# Altium PCB CANdruino.PcbDoc
Units mm, origin at the board's own origin, x right, y up, seen from the top; angles counter-clockwise.
Board outline 74 x 18.5 mm, 2 copper layers (Top Layer, Bottom Layer); 42 components, 48 nets, 198 pads, 33 vias.
Unrouted connection lines stored in the file: 131.
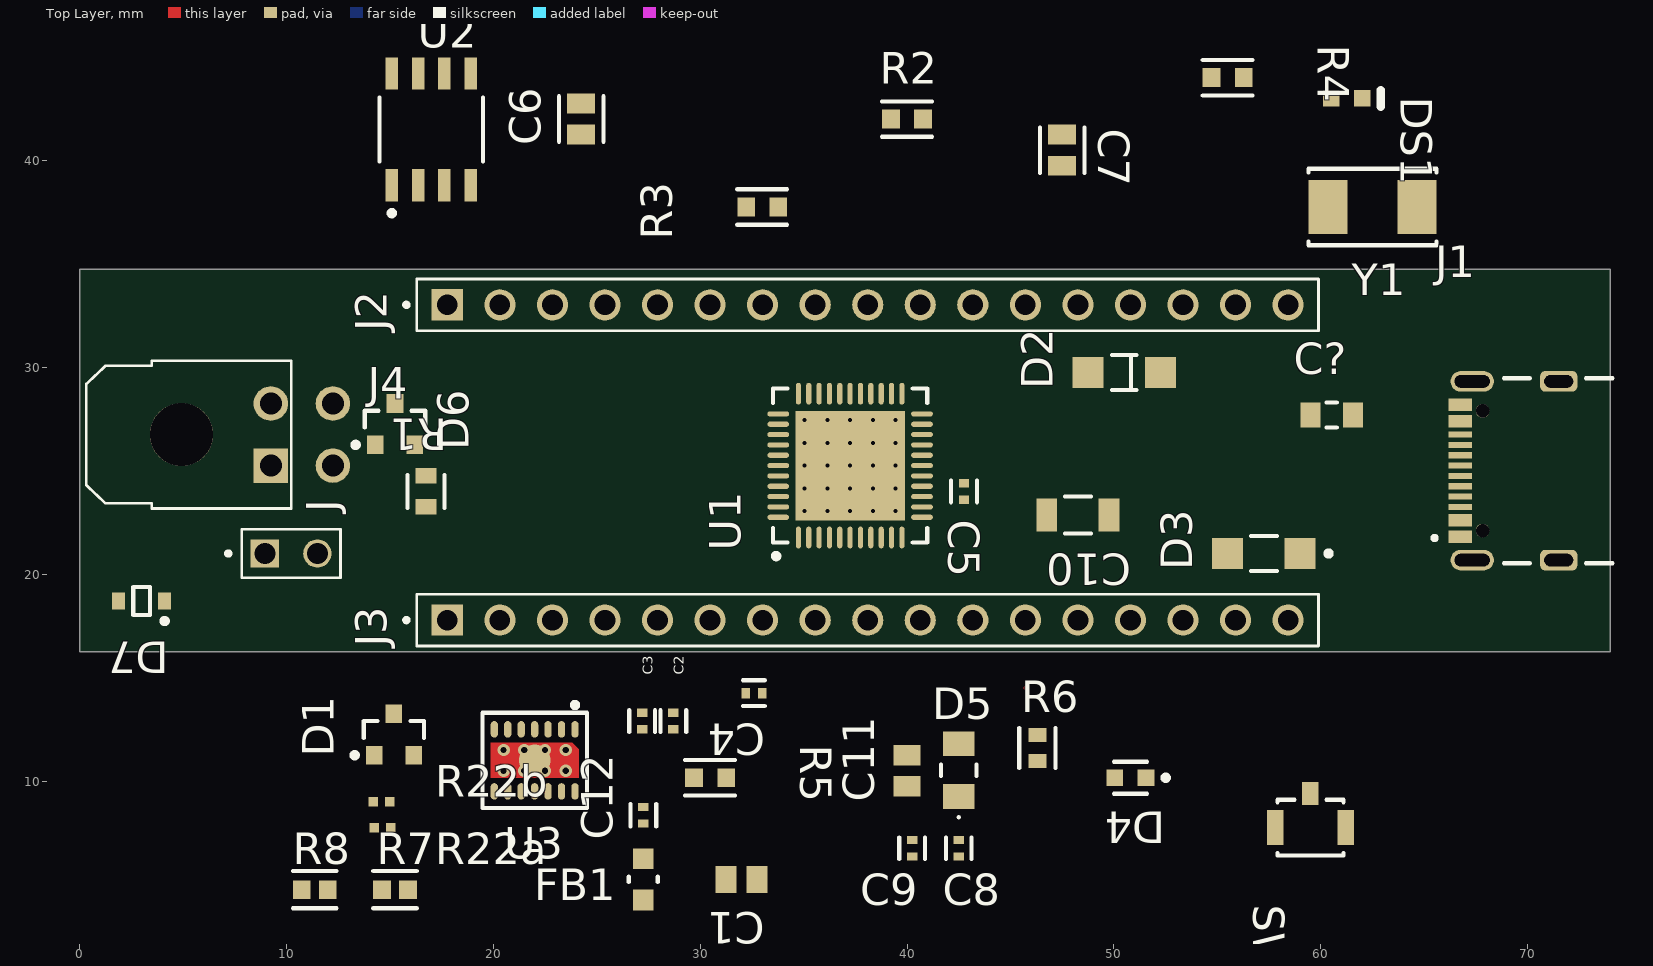
[diagram p0: Top Layer view]
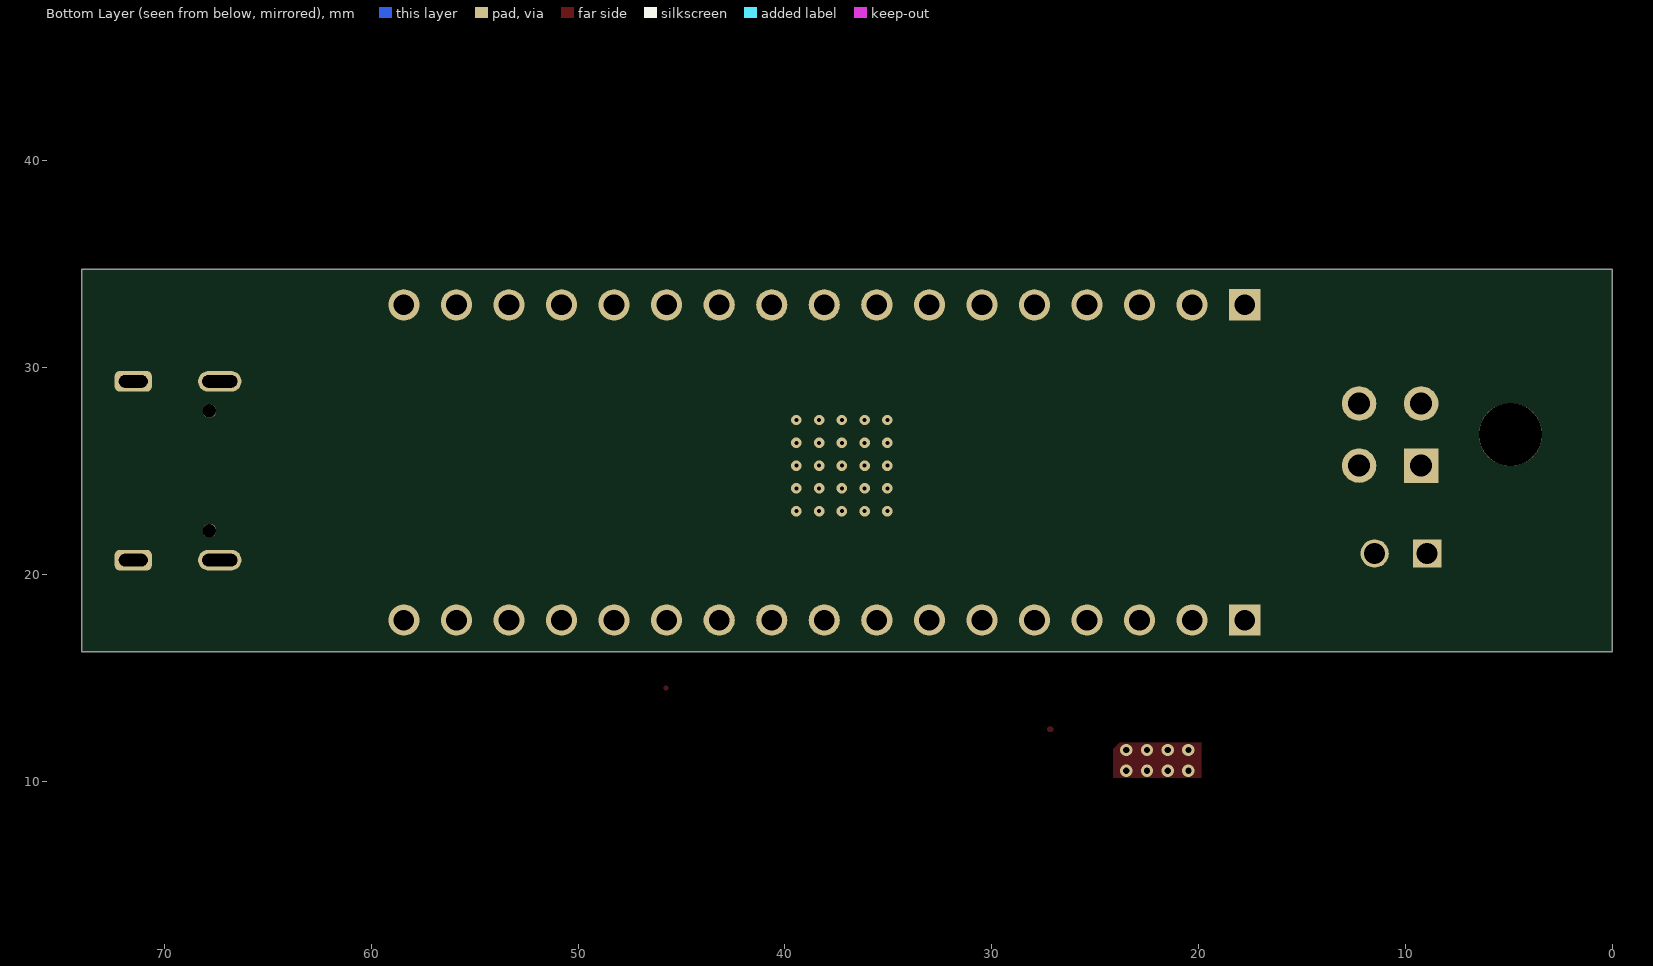
[diagram p1: Bottom Layer view, seen from below]

## Layer stack, top to bottom
Top Solder: solder mask 0.0102, Solder Resist, Dk 3.5
Top Layer: signal copper 0.0356
Dielectric 1: dielectric 0.32, FR-4, Dk 4.8
Bottom Layer: signal copper 0.0356
Bottom Solder: solder mask 0.0102, Solder Resist, Dk 3.5

## Board outline
0,16.25 0,34.75 74,34.75 74,16.25

## Design rules (kind name [scope] priority, off if disabled: settings)
BoardOutlineClearance [All] p1: gap=0.2 ignorepadtopadclearanceinfootprint=FALSE
Clearance [All] p1: gap=0.09 ignorepadtopadclearanceinfootprint=FALSE except(0.1: Arc-SMDPad Track-SMDPad; 0.15: SMDPad-SMDPad; 0.2: Arc-Via Track-Via Via-Fill Via-Poly Via-Region; 0.3: THPad-Fill THPad-Poly THPad-Region; 0.35: Arc-THPad Track-THPad)
ComponentClearance [All] p1: gap=0.01 collisioncheckmode=3 verticalgap=0.01 showdistances=FALSE
MinimumAnnularRing [All] p1: minimumring=0.2
MinimumSolderMaskSliver [All] p1: minsoldermaskwidth=0.1
PolygonConnect [All] p1: connectstyle=Relief reliefconductorwidth=0.254 reliefentries=4 polygonreliefangle="90 Angle" airgapwidth=0.254
RoutingVias [All] p1: holewidth=0.711 width=1.27 viastyle="Through Hole" minholewidth=0.711 minwidth=1.11 maxholewidth=0.711 maxwidth=1.27
SolderMaskExpansion [All] p1: expansion=0.038 istentingtop=FALSE
SupplyNets "Schematic Supply Nets_2" [InNet('GND')] p1: voltage=0.000
SupplyNets "Schematic Supply Nets" [InNet('+5')] p2: voltage=0.000
Width [All] p1: maxlimit=0.254 minlimit=0.16 preferedwidth=0.254 minimp=50.000000 maximp=50.000000 favimp=50.000000
28 further rules are at their usual default settings.

## Components (designator, comment, footprint, x,y, rotation, side; value= is the part's Value field where it differs from the comment)
C1 "1uF" CAPC2013X135X45LL10T25 32,5.25 r180 top
C2 "100nF" FP-GRM15-MFG 28.7,12.9 r90 top value=0.10μF
C3 "100nF" FP-GRM15-MFG 27.2,12.9 r90 top value=0.10μF
C4 "100nF" FP-GRM15-MFG 32.6,14.25 r180 top value=0.10μF
C5 "100nF" FP-GRM15-MFG 42.75,24 r90 top value=0.10μF
C6 "18 pF" FP-C0805C-DN-MFG 24.25,42 r90 top
C7 "18 pF" FP-C0805C-DN-MFG 47.5,40.5 r90 top
C8 "100nF" FP-GRM15-MFG 42.5,6.75 r270 top value=0.10μF
C9 "100nF" FP-GRM15-MFG 40.25,6.75 r270 top value=0.10μF
C10 "100nF" FP-1206-L_3_2_0_2-W_1_6_0-MFG 48.26,22.86 r180 top
C11 "1uF" CAPC2013X135X45LL10T25 40,10.5 r90 top
C12 "1uF" FP-GRM15-0_1-MFG 27.25,8.35 r90 top
C? "CGA3E2X7R1H104K080AA" FP-CGA3E-0_3-0_1-IPC_A 60.525,27.7 r0 top
D1 "SM05T1G" ONSC-SOT-23-3-318-08_V 15.2,12.25 r90 top
D2 "HSMG-C150" FP-HSMG-C150-MFG 50.5,29.75 r180 top
D3 "HSMS-C150" FP-HSMS-C150-MFG 57.25,21 r180 top
D4 "HSMR-C191" FP-HSMR-C191-MFG 50.8,10.16 r180 top
D5 "CD1206-S01575" BOUR-CD1206-S01575-2_L 42.5,10.525 r270 top
D6 "SM05T1G" ONSC-SOT-23-3-318-08_V 15.25,27.25 r90 top
D7 "SZMM3Z5V1T1G" ONSC-SOD-323-2-477-02_V 3,18.7 r180 top
DS1 "HSMY-C190" AVAG-HSMX-C190_V 61.25,43 r0 top
FB1 "MH2029-300Y" FP-MH2029-MFG 27.25,5.25 r90 top value=30Ω
J "3-644456-2" TE_3-644456-2 8.96,21 r0 top
J1 "USB4105GFA060" GCT_USB4105GFA060 71.5,25 r90 top
J2 "M20-7821746" HARWIN_M20-7821746 38.1,33.02 r180 top
J3 "M20-7821746" HARWIN_M20-7821746 38.1,17.78 r180 top
J4 "43045-0400" MOLEX_43045-0400 6.45,26.75 r270 top
R1 "120" FP-CRCW0603-e3-MFG 16.75,24 r90 top
R2 "AC0603FR-071KL" FP-AC0603-IPC_B 40,42 r0 top
R3 "AC0603FR-071KL" FP-AC0603-IPC_B 33,37.75 r180 top
R4 "AC0603FR-071KL" FP-AC0603-IPC_B 55.5,44 r0 top
R5 "AC0603FR-071KL" FP-AC0603-IPC_B 30.48,10.16 r0 top
R6 "10k" FP-MCT0603-IPC_C 46.3,11.6 r270 top
R7 "56k Ohm" FP-RR0816-IPC_C 15.25,4.75 r180 top
R8 "56K" FP-RR0816-IPC_C 11.374,4.75 r0 top
R22a "22" RESC1005X40X25LL05T05 14.65,7.75 r180 top
R22b "22" RESC1005X40X25LL05T05 14.6,9 r180 top
SW1 "B3U-1100PM" FP-B3U-1100PM-MFG 59.5,7.75 r180 top
U1 "ATmega32U4-MU" 44PW_M 37.25,25.25 r90 top
U2 "MCP2561FDT-E/SN" FP-C04-057-SN-MFG 17,41.5 r90 top
U3 "MCP2518FDT-E/QBB" FP-C04-21361-MFG 22,11 r270 top
Y1 "ABM7-16.000MHZ-D2Y-T" FP-ABM7-MFG 62.5,37.75 r0 top

## Footprints (in the part's own frame and the unit in brackets; to place one, negate y for a bottom-side part, rotate by r counter-clockwise, add the part's x,y. Pads: shape width x height; smd on the part's side, far side on the other; paste and mask are expansions set on the pad)
44PW_M [mm] "QFN, 44-Leads, Body 7x7mm, Pitch 0.5mm, Thermal Pad 5.3x5.3mm, IPC Low Density"
  oval 1.05x0.25 smd: 1(-3.475,2.5) 2(-3.475,2) 3(-3.475,1.5) 4(-3.475,1) 5(-3.475,0.5) 6(-3.475,0) 7(-3.475,-0.5) 8(-3.475,-1) 9(-3.475,-1.5) 10(-3.475,-2) 11(-3.475,-2.5) 23(3.475,-2.5) 24(3.475,-2) 25(3.475,-1.5) 26(3.475,-1) 27(3.475,-0.5) 28(3.475,0) 29(3.475,0.5) 30(3.475,1) 31(3.475,1.5) 32(3.475,2) 33(3.475,2.5)
  oval 0.25x1.05 smd: 12(-2.5,-3.475) 13(-2,-3.475) 14(-1.5,-3.475) 15(-1,-3.475) 16(-0.5,-3.475) 17(0,-3.475) 18(0.5,-3.475) 19(1,-3.475) 20(1.5,-3.475) 21(2,-3.475) 22(2.5,-3.475) 34(2.5,3.475) 35(2,3.475) 36(1.5,3.475) 37(1,3.475) 38(0.5,3.475) 39(0,3.475) 40(-0.5,3.475) 41(-1,3.475) 42(-1.5,3.475) 43(-2,3.475) 44(-2.5,3.475)
  rect 5.3x5.3 smd: 45(0,0)
  silkscreen extent -4.5,-3.73 3.73,3.72, body extent -3.57,-3.57 3.57,3.57, height 0.9
AVAG-HSMX-C190_V [mm] "SMD, 2-Leads, Body 1.6x0.8mm, Height 0.9mm"
  rect 0.8x0.8 smd: 1(-0.75,0) 2(0.75,0)
  silkscreen extent 1.65,-0.4 1.65,0.4, body extent -0.8,-0.4 0.8,0.4, height 0.9
BOUR-CD1206-S01575-2_L [mm] "Molded Diode, 2-Leads, Body 3.4x1.7mm, IPC High Density"
  rect 1.2x1.5 smd: 1(-1.275,0) 2(1.275,0)
  silkscreen extent -0.28,-0.85 2.32,0.85, body extent -1.7,-0.85 1.7,0.85, height 0.95
CAPC2013X135X45LL10T25 [mm] "Chip Capacitor, 2-Leads, Body 2.00x1.25mm, IPC High Density"
  rect 1x1.3 smd: 1(-0.75,0) 2(0.75,0)
  body extent -1.05,-0.67 1.05,0.68, height 1.35
FP-1206-L_3_2_0_2-W_1_6_0-MFG [mm]
  rect 1x1.6 smd paste+0 mask+0: 1(-1.5,0) 2(1.5,0)
  silkscreen extent -0.63,-0.9 0.63,0.9, body extent -2.1,-1 2.1,1, height 0.25
FP-ABM7-MFG [mm]
  rect 1.9x2.6 smd paste+0 mask+0: 1(-2.15,0) 2(2.15,0)
  silkscreen extent -3.1,-1.85 3.1,1.85, body extent -3.2,-1.95 3.2,1.95, height 0.25
FP-AC0603-IPC_B [mm]
  rect 0.859x0.912 smd paste+0 mask+0: 1(-0.777,0) 2(0.777,0)
  silkscreen extent -1.21,-0.86 1.21,0.86, body extent -1.46,-0.71 1.46,0.71, height 0.25
FP-B3U-1100PM-MFG [mm]
  rect 0.8x1.7 smd paste+0 mask+0: 1(1.7,0) 2(-1.7,0)
  rect 0.8x1.1 smd paste+0 mask+0: 3(0,-1.65)
  silkscreen extent -1.6,-1.35 1.6,1.35, body extent -2.2,-2.3 2.2,1.45, height 0.25
FP-C04-057-SN-MFG [mm]
  rect 1.55x0.6 smd paste+0 mask+0: 1(-2.7,1.905) 2(-2.7,0.635) 3(-2.7,-0.635) 4(-2.7,-1.905) 5(2.7,-1.905) 6(2.7,-0.635) 7(2.7,0.635) 8(2.7,1.905)
  silkscreen extent -4.17,-2.5 1.55,2.5, body extent -3.57,-2.75 3.57,2.75, height 0.25
FP-C04-21361-MFG [mm]
  rrect100% 0.8x0.35 smd paste+0 mask+0: 1(-1.5,1.95) 2(-1.5,1.3) 3(-1.5,0.65) 4(-1.5,0) 5(-1.5,-0.65) 6(-1.5,-1.3) 7(-1.5,-1.95) 8(1.5,-1.95) 9(1.5,-1.3) 10(1.5,-0.65) 11(1.5,0) 12(1.5,0.65) 13(1.5,1.3) 14(1.5,1.95)
  round 1.53 smd paste+0 mask+0: 15(0,0)
  Top Layer region: 0.85,2.125 -0.55,2.125 -0.85,1.825 -0.85,-2.125 0.85,-2.125 0.85,2.125
  silkscreen extent -2.8,-2.52 2.3,2.52, body extent -2,-2.4 2,2.4, height 0.25
FP-C0805C-DN-MFG [mm]
  rect 0.95x1.35 smd paste+0 mask+0: 1(-0.75,0) 2(0.75,0)
  silkscreen extent -1.1,-1.07 1.1,1.07, body extent -1.4,-0.85 1.4,0.85, height 0.25
FP-CGA3E-0_3-0_1-IPC_A [mm]
  rect 0.956x1.206 smd paste+0 mask+0: 1(-1.025,0) 2(1.025,0)
  silkscreen extent -0.25,-0.6 0.25,0.6, body extent -2,-1.1 2,1.1, height 0.25
FP-CRCW0603-e3-MFG [mm]
  rect 0.75x1 smd paste+0 mask+0: 1(-0.75,0) 2(0.75,0)
  silkscreen extent -0.8,-0.9 0.8,0.9, body extent -1.22,-0.6 1.22,0.6, height 0.25
FP-GRM15-0_1-MFG [mm]
  rect 0.4x0.5 smd paste+0 mask+0: 1(-0.4,0) 2(0.4,0)
  silkscreen extent -0.55,-0.63 0.55,0.63, body extent -0.7,-0.38 0.7,0.38, height 0.25
FP-GRM15-MFG [mm]
  rect 0.4x0.5 smd paste+0 mask+0: 1(-0.4,0) 2(0.4,0)
  silkscreen extent -0.53,-0.63 0.53,0.63, body extent -0.7,-0.38 0.7,0.38, height 0.25
FP-HSMG-C150-MFG [mm]
  rect 1.5x1.5 smd paste+0 mask+0: 1(-1.75,0) 2(1.75,0)
  silkscreen extent -0.6,-0.85 0.6,0.85, body extent -2.6,-0.95 2.6,0.95, height 0.25
FP-HSMR-C191-MFG [mm]
  rect 0.8x0.8 smd paste+0 mask+0: 1(-0.75,0) 2(0.75,0)
  silkscreen extent -1.83,-0.77 0.8,0.77, body extent -1.25,-0.55 1.25,0.55, height 0.25
FP-HSMS-C150-MFG [mm]
  rect 1.5x1.5 smd paste+0 mask+0: 1(-1.75,0) 2(1.75,0)
  silkscreen extent -3.25,-0.85 0.63,0.85, body extent -2.6,-0.95 2.6,0.95, height 0.25
FP-MCT0603-IPC_C [mm]
  rect 0.664x0.862 smd paste+0 mask+0: 1(-0.629,0) 2(0.629,0)
  silkscreen extent -0.96,-0.87 0.96,0.87, body extent -1.06,-0.58 1.06,0.58, height 0.25
FP-MH2029-MFG [mm]
  rect 1x1 smd paste+0 mask+0: 1(-1,0) 2(1,0)
  silkscreen extent -0.13,-0.7 0.13,0.7, body extent -1.6,-0.8 1.6,0.8, height 0.25
FP-RR0816-IPC_C [mm]
  rect 0.855x0.906 smd paste+0 mask+0: 1(-0.626,0) 2(0.626,0)
  silkscreen extent -1.05,-0.9 1.05,0.9, body extent -1.15,-0.6 1.15,0.6, height 0.25
GCT_USB4105GFA060 [mm]
  rect 0.6x1.15 smd: A1_B12(-3.2,4.755) A4_B9(-2.4,4.755) B1_A12(3.2,4.755) B4_A9(2.4,4.755)
  rect 0.3x1.15 smd: A5(-1.25,4.755) A6(-0.25,4.755) A7(0.25,4.755) A8(1.25,4.755) B5(1.75,4.755) B6(0.75,4.755) B7(-0.75,4.755) B8(-1.75,4.755)
  oval 1x2.1 hole 0.6 slot 1.7 at 90 deg: SH1(-4.32,4.18) SH2(4.32,4.18)
  rrect50% 1x1.8 hole 0.6 slot 1.4 at 90 deg: SH3(-4.32,0) SH4(4.32,0)
  round 0.65 hole 0.65 unplated: ""(-2.89,3.68) ""(2.89,3.68)
  silkscreen extent -4.47,-2.6 4.47,6.1
HARWIN_M20-7821746 [mm]
  rect 1.508x1.508 / inner round 1.508 / far side rect 1.508x1.508 hole 1: 1(20.32,0)
  round 1.508 hole 1: 2(17.78,0) 3(15.24,0) 4(12.7,0) 5(10.16,0) 6(7.62,0) 7(5.08,0) 8(2.54,0) 9(0,0) 10(-2.54,0) 11(-5.08,0) 12(-7.62,0) 13(-10.16,0) 14(-12.7,0) 15(-15.24,0) 16(-17.78,0) 17(-20.32,0)
  silkscreen extent -21.79,-1.25 22.4,1.25
MOLEX_43045-0400 [mm]
  rect 1.67x1.67 hole 1.07: 1(1.5,2.8)
  round 1.67 hole 1.07: 2(-1.5,2.8) 3(1.5,5.8) 4(-1.5,5.8)
  round 3.05 hole 3.05 unplated: ""(0,-1.52)
  silkscreen extent -3.57,-6.12 3.57,3.79
ONSC-SOD-323-2-477-02_V [mm] "SOD, 2-Leads, Body 1.7x1.25mm"
  rect 0.63x0.83 smd: 1(-1.115,0) 2(1.115,0)
  silkscreen extent -1.24,-0.67 0.4,1.09, body extent -0.85,-0.63 0.85,0.63, height 1.06
ONSC-SOT-23-3-318-08_V [mm] "SOT23, 3-Leads, Body 2.92x1.3mm, Pitch 0.95mm"
  rect 0.9x0.8 smd: 1(-1,0.95) 2(-1,-0.95) 3(1,0)
  silkscreen extent -1.12,-1.46 0.65,2.02, body extent -0.65,-1.46 0.65,1.46, height 1.11
RESC1005X40X25LL05T05 [mm] "Chip Resistor, 2-Leads, Body 1.00x0.50mm, IPC High Density"
  rect 0.45x0.45 smd: 1(-0.4,0) 2(0.4,0)
  body extent -0.53,-0.27 0.53,0.28, height 0.4
TE_3-644456-2 [mm]
  rect 1.37x1.37 hole 1.02: 1(0,0)
  round 1.37 hole 1.02: 2(2.54,0)
  silkscreen extent -1.87,-1.17 3.66,1.17

## Part data
C1 C11: library part CMP-1036-04761-2, Manufacturer=Murata, Part Number=GRM21BR71H105KA12L
C2 C3 C4 C5 C8 C9: library part CMP-2100-03641-2, "CAP CER 0.1UF 16V X7R 0402", Capacitance=0.10μF, Manufacturer=Murata, Manufacturer Part Number=GRM155R71C104KA88D, Package=GRM15, Temperature="-55°C to +125°C", Temperature Characteristic=X7R, Temperature Range High=+125°C, Temperature Range Low=-55°C, Tolerance=10%, Voltage Rating=16Vdc, Category=Cap, ComponentLink2Description=Datasheet, ComponentLink2URL=https://search.murata.co.jp/Ceramy/image/img/A01X/G101/ENG/GRM155R71H471KA01-01A.pdf, Device Class L1="Passive Components", Device Class L2=Capacitors, Device Class L3="Ceramic Capacitors", Digikey Description="CAP CER 0.1UF 16V X7R 0402", Height=0.55mm, Ipc Land Pattern Name=CAPC10050X219, Lead Free=yes, Material=Ceramic, Mouser Description="0402 0.1 uF 16V ±10 % Tolerance X7R SMT Multilayer Ceramic Capacitor", Octopart=https://octopart.com/grm155r71c104ka88d-murata-196880, RoHS=TRUE, Standoff Height=0mm
C6 C7: library part CMP-2007-00302-2, "CAP CER 18PF 50V C0G/NP0 0805", Manufacturer=KEMET, Manufacturer Part Number=C0805C180J5GACTU, Package=C0805C-DN, Temperature="-55°C to +125°C", Temperature Characteristic=C0G, Temperature Coefficient=30ppm/°C, Temperature Range High=+125°C, Temperature Range Low=-55°C, Tolerance=0.05, Voltage Rating="50 V", Automotive=No, Capacitance="18 pF", Category=Cap, ComponentLink2Description=Datasheet, ComponentLink2URL=https://content.kemet.com/datasheets/KEM_C1003_C0G_SMD.pdf, Device Class L1="Passive Components", Device Class L2=Capacitors, Device Class L3="Ceramic Capacitors", Digikey Description="CAP CER 18PF 50V C0G/NP0 0805", Height=0.88mm, Ipc Land Pattern Name=CAPC200125X78, Lead Free=Yes, Material=Ceramic, Mouser Description="Cap Ceramic 18pF 50V C0G 5% SMD 0805 125C Paper T/R", Octopart=https://octopart.com/c0805c180j5gactu-kemet-144810, RoHS=TRUE
C10: library part CMP-04427-004798-1, "General Purpose Ceramic Capacitor, 1206, 100nF, 10%, X7R, 15%, 100V", Case Code (Imperial)=1206, Case Code (Metric)=3216, Dielectric=X7R, Max Operating Temperature=125°C, Min Operating Temperature=-55°C, Package Quantity=1, Tolerance=10%, Voltage Rating=100V, Capacitance=100nF, Case/Package=1206, Construction=Flat, Depth=1.6mm, Features="Soft Termination", Lead Free="Lead Free", Length=3.2mm, Mount="Surface Mount", Number of Pins=2, Packaging="Tape and Reel", Radiation Hardening=No, REACH SVHC="No SVHC", RoHS Compliant=Yes, Series=FLEXITERM®, Termination=SMD/SMT, Thickness=0.05inch, Voltage Rating (DC)=100V, Width=0.063inch
C12: library part CMP-2008-04556-2, "CAP CER 1UF 10V X5R 0402", Manufacturer=Murata, Manufacturer Part Number=GRM155R61A105KE15D, Package=GRM15-0.1, Temperature="-55°C to +85°C", Temperature Characteristic=X5R, Temperature Coefficient=15%, Temperature Range High=+85°C, Temperature Range Low=-55°C, Tolerance=10%, Voltage Rating=10V, Automotive=No, Capacitance=1uF, Category=Cap, ComponentLink2Description=Datasheet, ComponentLink2URL=https://search.murata.co.jp/Ceramy/image/img/A01X/G101/ENG/GRM155R61A105KE15-01A.pdf, Device Class L1="Passive Components", Device Class L2=Capacitors, Device Class L3="Ceramic Capacitors", Digikey Description="CAP CER 1UF 10V X5R 0402", Height=0.55mm, Ipc Land Pattern Name=CAPC10050X50, Lead Free=Yes, Material=Ceramic, Mouser Description="0402 1 uF 10 V ±10% Tolerance X5R Surface Mount Multilayer Ceramic Capacitor", Octopart=https://octopart.com/grm155r61a105ke15d-murata-197442, RoHS=TRUE
C?: library part CMP-2000-07546-2, "Cap Ceramic 100nF 50V X7R 10% Pad SMD 0603 +125°C Automotive T/R", Capacitance=100nF, Case Code (Imperial)=0603, Case Code (Metric)=1608, Dielectric=X7R, Max Operating Temperature=125°C, Min Operating Temperature=-55°C, Package Quantity=1, Ratings=AEC-Q200, Tolerance=10%, Voltage=50V, Case/Package=0603, Composition=Ceramic, Depth=0.8mm, Height=0.8mm, Lead Free="Lead Free", Length=1.6mm, Mount="Surface Mount", Packaging="Tape and Reel", Radiation Hardening=No, REACH SVHC="No SVHC", Termination=SMD/SMT, Thickness=0.035inch, Voltage Rating=50V, Voltage Rating (DC)=50V, Weight=7.1E-05oz, Width=0.8mm
D1 D6: library part CMP-1061-00666-1, "Transient Voltage Suppressor Diode Array, Dual Common Anode Diodes for ESD Protection, 3-Pin SOT-23, Pb-Free, Tape and Reel", Manufacturer="On Semiconductor", ComponentLink1Description="Manufacturer URL", ComponentLink1URL=http://www.onsemi.com/, ComponentLink2Description=Datasheet, ComponentLink2URL=http://www.onsemi.com/pub_link/Collateral/SM12T1-D.PDF, ComponentLink3Description="Package Specification", ComponentLink3URL=http://www.onsemi.cn/pub_link/Collateral/318-08.PDF, DatasheetVersion="Rev. 6", Direction=Unidirectional, IR Max (uA)=10, Mounting Technology="Surface Mount", PackageDescription="3-Pin Small Outline Transistor, Body 2.92 x 1.3 mm, Pitch 0.95 mm", PackageReference=SOT-23-3-318-08, PackageVersion="Rev. AP, 11/2009", Packing="Tape and Reel", PartNumber=SM05T1G, PPK Max (W)=300, RoHS=Pb-Free
D2: library part CMP-2000-05061-2, "LED GREEN DIFFUSED 1206 SMD", Colour=Green, Forward Current=20mA, Forward Voltage=2.2V, Manufacturer=Broadcom, Max Junction Temp=+95°C, Power Dissipation=65mW, Reverse Voltage=5V, Temperature="-40°C to +85°C", Temperature Range High=+85°C, Temperature Range Low=-40°C, Automotive=No, Category=Diode, ComponentLink2Description=Datasheet, ComponentLink2URL=https://docs.broadcom.com/docs/AV02-0551EN, Device Class L1=Optoelectronics, Device Class L2=LEDs, Device Class L3=unset, Digikey Description="LED GREEN DIFFUSED 1206 SMD", Height=1.2mm, Ipc Land Pattern Name=DIOCP320160X55, Lead Free=Yes, Led Orientation="Top View", Luminous Intensity=15mcd, Manufacturer Part Number=HSMG-C150, Mouser Description="LED Uni-Color Green 570nm 2-Pin Chip LED T/R", Octopart=https://octopart.com/hsmg-c150-broadcom-71131304, Package=HSMG-C150, Peak Emmision Wavelength=570nm, RoHS=TRUE, Viewing Angle=170°, Wavelength=572nm
D3: library part CMP-21615-000001-1, "LED RED DIFFUSED CHIP SMD", Case Code (Imperial)=1206, Case Code (Metric)=3216, Color=Red, Forward Current=20mA, Forward Voltage=2.1V, Lens Color=White, Max Operating Temperature=85°C, Min Operating Temperature=-40°C, Package Quantity=1, Power Dissipation=65mW, Reverse Voltage=5V, Case/Package=1206, Depth=1.6mm, Dominant Wavelength=626nm, Height=1.1mm, Illumination Color=Red, Lead Free="Lead Free", Length=3.2mm, Lens Style=Rectangular, Lens Transparency=Diffused, Luminous Intensity=10mcd, Mount="Surface Mount", Number of Elements=1, Number of LEDs=1, Number of Pins=2, Packaging="Tape and Reel", Power Rating=65mW, Radiation Hardening=No, REACH SVHC="No SVHC", Test Current=20mA, Viewing Angle=170°, Wavelength=626nm, Width=1.6mm
D4: library part CMP-02129-71131536-1, "HSMR-C191 High-Performance Chip LED Single Color LED, Blue, Untinted Diffused, 1mm", Case Code (Imperial)=0603, Case Code (Metric)=1608, Color=Blue, Forward Current=20mA, Forward Voltage=3.4V, Lens Color="Clear, White", Max Junction Temperature (Tj)=95°C, Max Operating Temperature=85°C, Max Power Dissipation=78mW, Min Operating Temperature=-40°C, Reverse Voltage=5V, Case/Package=0603, Contact Plating=Gold, Depth=800µm, Dominant Wavelength=473nm, Height=600µm, Illumination Color=Blue, Lead Free="Lead Free", Length=1.6mm, Lens Style=Diffused, Lens Transparency=Diffused, Luminous Flux=88lm, Luminous Intensity=55mcd, Mount="Surface Mount", NexarPartId=71131536, Number of Elements=1, Number of LEDs=1, Number of Pins=2, Packaging="Tape and Reel", Peak Wavelength=469nm, Power Dissipation=78mW, Power Rating=78mW, Radiation Hardening=No, REACH SVHC="No SVHC", RoHS=Compliant, Schedule B=8541402000, Test Current=20mA, Viewing Angle=140°, Wavelength=473nm, Width=800µm
D5: library part CMP-0583-00001-2, "75 V Small Signal Switching Diode, 150 mA, 2.5 uA, 1026 Molded Package, RoHS, Tape and Reel", Average Forward Current="150 mA", Capacitance Between Terminals (Max.)="3 pF", Forward Voltage (Max.)="1.00 V", Manufacturer=Bourns, Reverse Current (Max.)="2.5 uA", Reverse Voltage="75 V", ComponentLink1Description="Manufacturer URL", ComponentLink1URL=http://www.bourns.com/, ComponentLink2Description=Datasheet, ComponentLink2URL=http://www.bourns.com/data/global/pdfs/CD1206_S01575.pdf, ComponentLink3Description="Package Specification", ComponentLink3URL=http://www.bourns.com/data/global/pdfs/CD1206_S01575.pdf, DatasheetVersion="Rev. 06/11", Mounting Technology="Surface Mount", PackageDescription="2-Pin SMD, Body 3.2 x 1.5 mm", PackageReference=CD1206-S01575-2, Packing="Tape and Reel", PartNumber=CD1206-S01575, Reverse Recovery Time (Max.)="4 nS", RoHS=TRUE
D7: library part CMP-1060-00693-1, "Zener Voltage Regulator, 300 mW, 2-Pin SOD-323, Pb-Free, Tape and Reel", Manufacturer="On Semiconductor", ComponentLink1Description="Manufacturer URL", ComponentLink1URL=http://www.onsemi.com/, ComponentLink2Description=Datasheet, ComponentLink2URL=http://www.onsemi.cn/pub_link/Collateral/MM3Z2V4T1-D.PDF, ComponentLink3Description="Package Specification", ComponentLink3URL=http://www.onsemi.com/pub_link/Collateral/477-02.PDF.1, DatasheetVersion="Rev. 9", Mounting Technology="Surface Mount", P Max (W)=0.3, PackageDescription="2-Pin SOD, Body 1.7 x 1.25 mm", PackageReference=SOD-323-2-477-02, PackageVersion="Rev. H, 03/2007", Packing="Tape and Reel", PartNumber=SZMM3Z5V1T1G, RoHS=Pb-Free, VZ Typ (V)=5.1
DS1: library part CMP-1744-00003-1, "LED Uni-Color Yellow, 65 mW, 20 mA, -40 to 85 degC, 2-Pin SMD, RoHS, Tape and Reel", Case Code (Imperial)=0603, Case Code (Metric)=1608, Max Operating Temperature="155 degC", Min Operating Temperature="-55 degC", Package Quantity=5000, Power Rating="100 mW", Resistance="390 Ohm", Tolerance=1%, Voltage Rating="50 V", Case\Package=0603, ComponentLink1Description="Manufacturer URL", ComponentLink1URL=http://www.avagotech.com/, ComponentLink2Description=Datasheet, ComponentLink2URL=http://docs.avagotech.com/docs/AV02-0551EN, ComponentLink3Description="Package Specification", ComponentLink3URL=http://www.fairchildsemi.com/dwg/MA/MA03D.pdf, DatasheetVersion=Mar-12, Height="0.45 mm", Length="1.6 mm", Mount="Surface Mount", PackageDescription="2-Pin Surface Mount Device, Body 1.6 x 0.8 mm, Height 0.9 mm", PackageReference=HSMX-C190, Packaging="Tape and Reel", Pins=2, REACH SVHC="No SVHC", RoHSCompliant=true, Voltage Rating (DC)="50 V", Width="0.8 mm"
FB1: library part CMP-07252-000001-1, "FERRITE BEAD 30 OHM 0805 1LN", Impedance At Frequency="30Ω @ 100MHz", Manufacturer=Bourns, Package=MH2029, Resistance=30Ω, Rms Current=3A, Series Resistance=25mΩ, Temperature="-55°C to +125°C", Temperature Range High=+125°C, Temperature Range Low=-55°C, Tolerance=25%, Automotive=No, Category=FBead, ComponentLink2Description=Datasheet, ComponentLink2URL=https://www.bourns.com/docs/Product-Datasheets/mh.pdf, Core Material=Ferrite, Device Class L1="Passive Components", Device Class L2="EMI / RFI Components", Device Class L3="Ferrite Beads and Chips", Digikey Description="FERRITE BEAD 30 OHM 0805 1LN", Height=1.1mm, Ipc Land Pattern Name=CAPC200120X90, Lead Free=Yes, Manufacturer Part Number=MH2029-300Y, Mouser Description="Ferrite Beads 30 ohms 25% HIGH CURRENT", Octopart=https://octopart.com/mh2029-300y-bourns-756929, RoHS=TRUE
J: library part CMP-002-00074-1, "Connector Unshrouded Header HDR 2 Position 2.54mm Solder Straight Thru-Hole", Case/Package=None, Centerline_Pitch="2.54 mm[.1 in]", Component Type=Standard, Design Item ID=3-644456-2, Digi-Key_Part_Number=A31112-ND, Digi-Key_Purchase_URL=https://www.digikey.com/product-detail/en/te-connectivity-amp-connectors/3-644456-2/A31112-ND/698344?utm_source=snapeda&utm_medium=aggregator&utm_campaign=symbol, EU_RoHS_Compliance=Compliant, MF="TE Connectivity", MP=3-644456-2, Number_of_Positions=2, Pins=2, Product_Type=Connector, SnapEDA_Link=https://www.snapeda.com/parts/3-644456-2/TE%20Connectivity%20AMP%20Connectors/view-part/520887/?ref=snap, Source=SnapEDAsch.SchLib, TE_purchase_URL=https://www.te.com/usa-en/product-3-644456-2.html?te_bu=Cor&te_type=disp&te_campaign=seda_glo_cor-seda-global-disp-prtnr-fy19-seda-model-bom-cta_sma-317_1&elqCampaignId=32493
J1: library part CMP-003-000000-1, Package=None, Availability=Unavailable, Component Type=Standard, Design Item ID=USB4105GFA060, MF="{'manufacturer': u'GCT'}", MP=USB4105GFA060, Pin Count=16, Price=None, Source=USB4105GFA060.SchLib
J2 J3: library part CMP-002-00071-1, "2.54mm (0.1) Pitch SIL Vertical Throughboard Socket Assembly, tin, 17 contacts", Case/Package=None, Check_prices=https://www.snapeda.com/parts/M20-7821746/Harwin/view-part/?ref=eda, Component Type=Standard, Design Item ID=M20-7821746, MF=Harwin, MP=M20-7821746, Pins=17, SnapEDA_Link=https://www.snapeda.com/parts/M20-7821746/Harwin/view-part/?ref=snap, Source=M20-7821746.SchLib
J4: library part CMP-002-00073-1, "Conn Micro-Fit 2x2 Way Header 3mm Pitch r/Angle Ti", Case/Package=None, Availability=Unavailable, Component Type=Standard, Design Item ID=43045-0400, MP=43045-0400, Pins=4, Price=None, Source=43045-0400.SchLib
R1: library part CMP-1666-00020-3, "RES Thick Film, 120Ω, 1%, 0.1W, 100ppm/°C, 0603", Case Code (Imperial)=0603, Case Code (Metric)=1608, Max Operating Temperature=155°C, Max Power Dissipation=100mW, Min Operating Temperature=-55°C, Package Quantity=10, Resistance=120R, Resistance Tolerance=1%, Resistor Type="Thick Film", Temperature Coefficient=100ppm/°C, Voltage Rating=75V, Case/Package=0603, Construction=Rectangular, Contact Plating=Tin, Depth=0.85mm, Features="Automotive AEC-Q200", Height=0.45mm, Lead Free="Lead Free", Length=1.55mm, Military Standard=Not, Mount="Surface Mount", Number of Terminations=2, Packaging="Tape and Reel", Power Rating=100mW, Radiation Hardening=No, RoHS Compliant=Yes, Series=CRCW, Technology="THICK FILM", Termination=SMD/SMT, Tolerance=1%, Voltage Rating (DC)=75V, Weight=7.1E-05oz, Width=0.033inch, Working Voltage=75V
R2 R3 R4 R5: library part CMP-2000-04828-3, "RES 1kΩ 1.00% 0.1W 0603", Case Code (Imperial)=0603, Case Code (Metric)=1608, Max Operating Temperature=155°C, Max Power Dissipation=100mW, Min Operating Temperature=-55°C, Package Quantity=1, Ratings=AEC-Q200, Resistance=1kR, Resistor Type="Thick Film", Temperature Coefficient=100ppm/°C, Tolerance=1%, Voltage Rating=50V, Case/Package=0603, Construction=Rectangular, Depth=0.8mm, Features="Moisture Resistant", Height=0.022inch, Lead Free="Lead Free", Length=0.063inch, Military Standard=Not, Number of Terminations=2, Packaging="Tape and Reel", Power Rating=100mW, RoHS Compliant=Yes, Series=AC, Size Code=0603, Termination=SMD/SMT, Width=0.031inch
R6: library part CMP-02407-000418-1, "RES SMD 100 OHM 1% 1/8W 0603", Case Code (Imperial)=0603, Case Code (Metric)=1608, Max Operating Temperature=125°C, Max Power Dissipation=125mW, Min Operating Temperature=-55°C, Package Quantity=1, Power Rating=100mW, Resistance=10kR, Temperature Coefficient=50ppm/°C, Tolerance=1%, Voltage Rating=75V, Case/Package=0603, Composition="Thin Film", Contact Plating=Tin, Depth=0.85mm, Height=0.022inch, Lead Free="Lead Free", Length=1.55mm, Military Standard=Not, Mount="Surface Mount", Number of Terminations=2, Packaging="Tape and Reel", Radiation Hardening=No, Voltage Rating (DC)=75V, Width=0.8mm
R7 R8: library part CMP-2000-02705-2, "56kΩ ±0.5% 0.0625W 1/16W Chip Resistor 0603 (1608 Metric) Thin Film", Case Code (Imperial)=0603, Case Code (Metric)=1608, Max Operating Temperature=125°C, Max Power Dissipation=63mW, Min Operating Temperature=-55°C, Package Quantity=1, Power Rating=62.5mW, Resistance=56kR, Resistance Tolerance=0.5%, Resistor Type="Thin Film", Temperature Coefficient=25ppm/°C, Voltage Rating=75V, Case/Package=0603, Depth=0.8mm, Height=0.4mm, Lead Free="Lead Free", Length=1.6mm, Number of Pins=2, Number of Terminations=2, Packaging="Tape and Reel", RoHS Compliant=Yes, Series=RR, Technology="THIN FILM", Termination=SMD/SMT, Tolerance=0.5%, Voltage Rating (DC)=75V, Width=0.031inch
R22a R22b: library part CMP-2002-08382-1, Manufacturer="Vishay Dale", Part Number=CRCW040222R0FKED
SW1: library part CMP-08834-000028-1, "SWITCH TACTILE SPST-NO 0.05A 12V", Case/Package=SMD/SMT, Contact Resistance=100mR, Current Rating=50mA, Max Operating Temperature=70°C, Max Voltage Rating (DC)=12V, Min Operating Temperature=-25°C, Operating Force=1.5N, Package Quantity=1000, Ratings="Dust Proof", Actuator Length=0.4mm, Actuator Type=Standard, Connector Type=SMD/SMT, Electrical Life=200000Cycles, Illumination Type=Non-Illuminated, Mechanical Life=200000Cycles, Mount="Surface Mount", Orientation=Straight, Packaging="Tape and Reel", REACH SVHC="No SVHC", RoHS Compliant=Yes, Series=B3U, Switch Function=Off-Mom, Switch Travel=0.15mm, Termination=SMD/SMT, Throw Configuration=SPST, Voltage Rating (DC)=12V, Weight=0.022g
U1: library part CMP-0095-00166-2, "8-bit AVR Microcontroller, 2.7-5.5V, 16MHz, 32KB Flash, 1KB EEPROM, 2.5KB SRAM, USB Controller, 44-pin QFN, Industrial Grade (-40°C to 85°C), Ext Osc", Code_JEDEC=MO-220-VKKD-1, ComponentLink1Description="Manufacturer URL", ComponentLink1URL=http://www.atmel.com/, ComponentLink2Description="ATmega16U4/32U4 Datasheet", ComponentLink2URL=http://www.atmel.com/dyn/resources/prod_documents/doc7766.pdf, ComponentLink3Description="ATmega16U4 ATmega32U4 Summary", ComponentLink3URL=http://www.atmel.com/dyn/resources/prod_documents/7766S.pdf, DatasheetVersion="revF, Nov-2010", PackageDescription="44-Pin Quad Flat No-Lead Package, 7 x 7 mm Body, 0.5 mm Pitch (QFN)", PackageReference=44PW, PackageVersion="revG, Sep-2009", RevisionNote="DatasheetVersion, PackageVersion & PCB updated. URLs added."
U2: library part CMP-06279-000064-1, "IC TRANSCEIVER 1/1 8SOIC", Case/Package=SOIC, Max Operating Temperature=125°C, Max Supply Voltage=5.5V, Min Operating Temperature=-40°C, Min Supply Voltage=4.5V, Operating Supply Current=70mA, Package Quantity=3300, Data Rate=8Mbps, Mount="Surface Mount", Number of Pins=8, Number of Transceivers=1, Packaging="Tape and Reel", Receiver Hysteresis=200mV, RoHS Compliant=Yes, Series=-, Weight=0.019048oz
U3: library part CMP-06298-000018-1, "IC CAN CONTROLLER SPI 14VDFN", RoHS Compliant=Yes
Y1: library part CMP-27762-000095-1, "Crystal 16MHz ±20ppm 18pF SMD-2 6mm x 3.5mm", Case/Package=CSMD, ESR (Equivalent Series Resistance)=50R, Frequency=16MHz, Frequency Stability=30ppm, Frequency Tolerance=20ppm, Load Capacitance=18pF, Max Operating Temperature=85°C, Min Operating Temperature=-40°C, Operating Frequency="16 MHz", Package Quantity=1000, Resistor Type=Ceramic, Depth=3.5mm, Height=0.055inch, Lead Free="Lead Free", Length=6mm, Mount="Surface Mount", Number of Pins=2, Packaging="Tape and Reel", Radiation Hardening=No, Series=ABM7, Termination=SMD/SMT, Tolerance=20ppm, Width=3.3mm

## Via types
v1: diameter 0.5, hole 0.2, Top Layer to Bottom Layer, 25 vias
v2: diameter 0.6, hole 0.3, Top Layer to Bottom Layer, 8 vias

## Nets (pads, with @x,y where several pads share a name; then routed paths per layer and width w, separated by ;. In a path a pad name is that pad's centre, name@x,y a point inside that pad or via, vN(x,y) a via of type N, cw(c..) or ccw(c..) an arc to the next point about the centre after c; other vN are vias at no path point)
+5: C1.2 C2.1 C3.1 C4.1 C5.1 C8.1 C9.1 C10.1 D5.2 D7.1 FB1.1 J1.A4_B9 J1.B4_A9 J3.6 J4.1 R6.2 U1.2 U1.7 U1.14 U1.24 U1.34 U1.44 U2.3 U3.14 | length 0
  Top Layer w0.254: C3.1@27.15,12.5 C3.1
A0: J3.14 U1.36
A1: J3.13 U1.37
A2: J3.12 U1.38
A3: J3.11 U1.39
A4: J3.10 U1.40
A5: J3.9 U1.41
CSCAN: J2.3 U1.30 U3.13
D2/SDA: J2.11 U1.19
D3/SCL: J2.10 U1.18
D4: J2.9 R5.1 U1.25
D5: J2.8 U1.31
D6: J2.7 U1.27
D7: J2.6 U1.1
D+: R22a.1 U1.4
D-: R22b.1 U1.3
GND: C1.1 C2.2 C3.2 C4.2 C5.2 C6.2 C7.2 C8.2 C9.2 C11.1 C12.2 D1.3 D2.1 D3.1 D4.1 D6.3 D7.2 DS1.2 J1.A1_B12 J1.B1_A12 J1.SH1 J1.SH2 J1.SH3 J1.SH4 J2.12 J3.4 J4.4 R7.2 R8.2 SW1.2 SW1.3 U1.5 U1.15 U1.23 U1.33 U1.35 U1.43 U1.45 U2.2 U2.8 U3.7 U3.15
  other v1: 35.05,23.05 36.15,23.05 37.25,23.05 38.35,23.05 39.45,23.05 35.05,24.15 36.15,24.15 37.25,24.15 38.35,24.15 39.45,24.15 35.05,25.25 36.15,25.25 37.25,25.25 38.35,25.25 39.45,25.25 35.05,26.35 36.15,26.35 37.25,26.35 38.35,26.35 39.45,26.35 35.05,27.45 36.15,27.45 37.25,27.45 38.35,27.45 39.45,27.45
  other v2: 20.5,10.5 21.5,10.5 22.5,10.5 23.5,10.5 20.5,11.5 21.5,11.5 22.5,11.5 23.5,11.5
IO08: J2.5 U1.28
IO09: J2.4 U1.29
IO11: J2.2 U1.12
IO12: J2.1 U1.26
IO13: J3.17 R2.1 U1.32
MISO: J3.2 U1.11 U3.12
MOSI: J2.17 U1.10 U3.11
NetC10_2: C10.2 U1.42
NetC11_2: C11.2 U1.6
NetC12_1: C12.1 FB1.2
NetD1_1: D1.1 J1.A7 R22b.2
NetD1_2: D1.2 J1.A6 R22a.2
NetD2_2: D2.2 R2.2
NetD3_2: D3.2 R4.2
NetD4_2: D4.2 R5.2
NetDS1_1: DS1.1 R3.1
NetJ1_A5: J1.A5 R7.1
NetJ1_B5: J1.B5 R8.1
NetJ_2: J.2 R1.2
NetR4_1: R4.1 U1.22
NetU2_1: U2.1 U3.1
NetU2_4: U2.4 U3.2
RESET: D5.1 J2.13 J3.5 R6.1 SW1.1 U1.13
RX: J2.14 U1.20
SCK: J3.1 U1.9 U3.10
SS: J2.16 R3.2 U1.8
TX: J2.15 U1.21
XTAL1: C6.1 U1.17 U3.6 Y1.1
XTAL2: C7.1 U1.16 U3.5 Y1.2
Zworka_high: D6.2 J4.2 J.1 U2.7
Zworka_low: D6.1 J4.3 R1.1 U2.6
pads on no net: C?.1 C?.2 J1. J1.A8 J1.B6 J1.B7 J1.B8 J3.3 J3.7 J3.8 J3.15 J3.16 J4. U2.5 U3.3 U3.4 U3.8 U3.9
copper on no net: | length 0

## Silkscreen, mask and mechanical layers (free items; w line width, h text height)
Mechanical 1:
  lines w0.1: 0,0 55.75,0 55.75,34 0,34 0,0

## Dimensions
17.78,33.02 to 17.78,17.78 on Top Layer

## Text inside footprints (layer, text, board x,y; h text height)
J1: Mechanical 13 "PCB EDGE" at 74,30.4 h0.41 r90